# Altium PCB 400003.PcbDoc
Units mm, origin at the board's own origin, x right, y up, seen from the top; angles counter-clockwise.
Board outline 28.23 x 22.35 mm, 4 copper layers (Top Layer, Mid-Layer 1, Mid-Layer 2, Bottom Layer), stack 0.852 mm thick; 75 components, 55 nets, 330 pads, 176 vias.
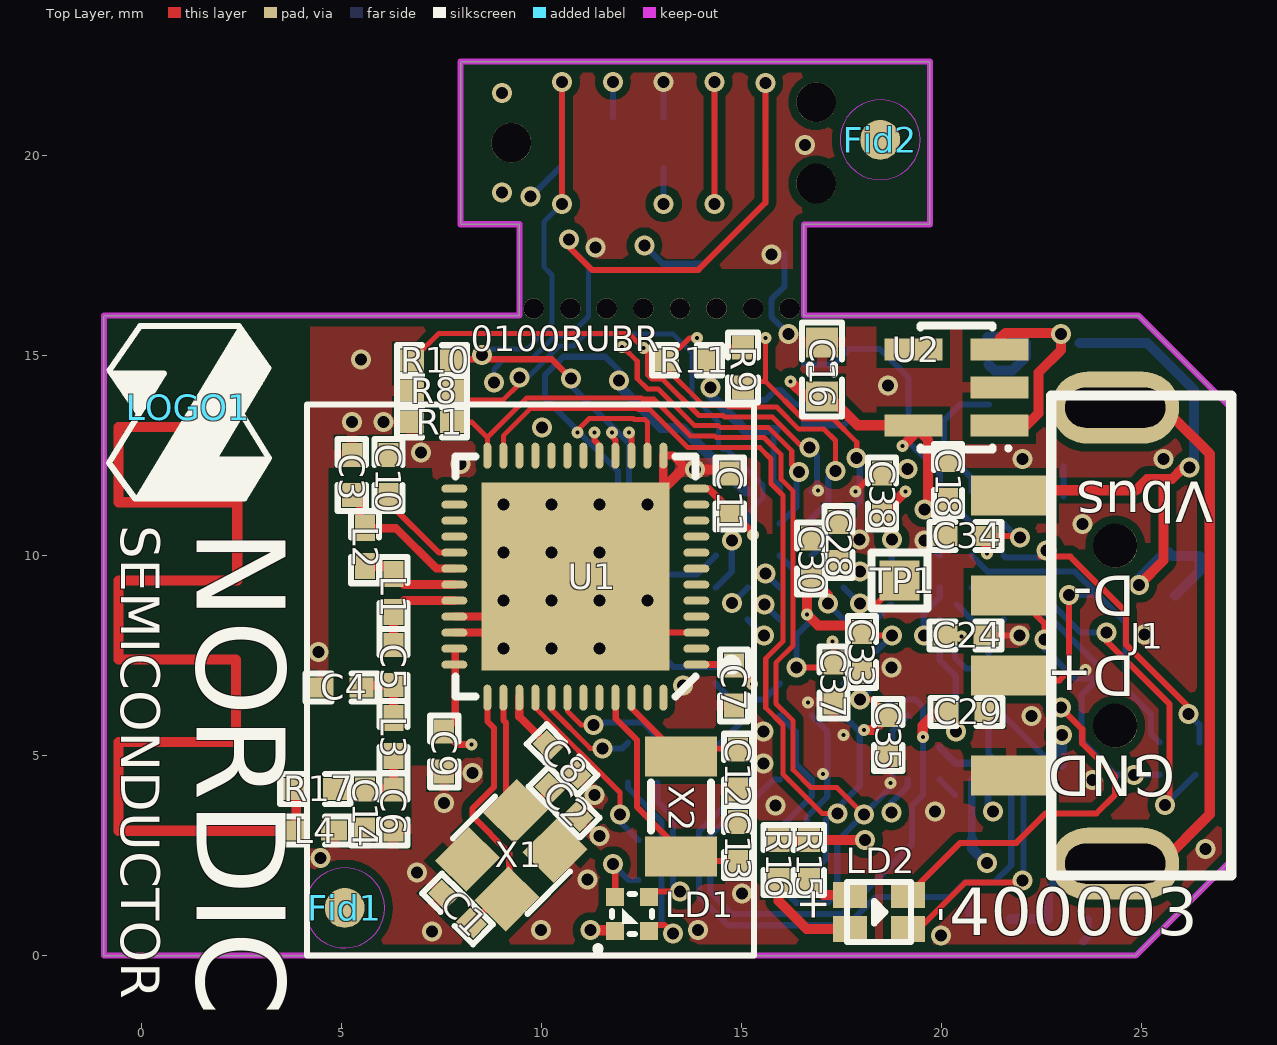
[diagram p0: Top Layer view]
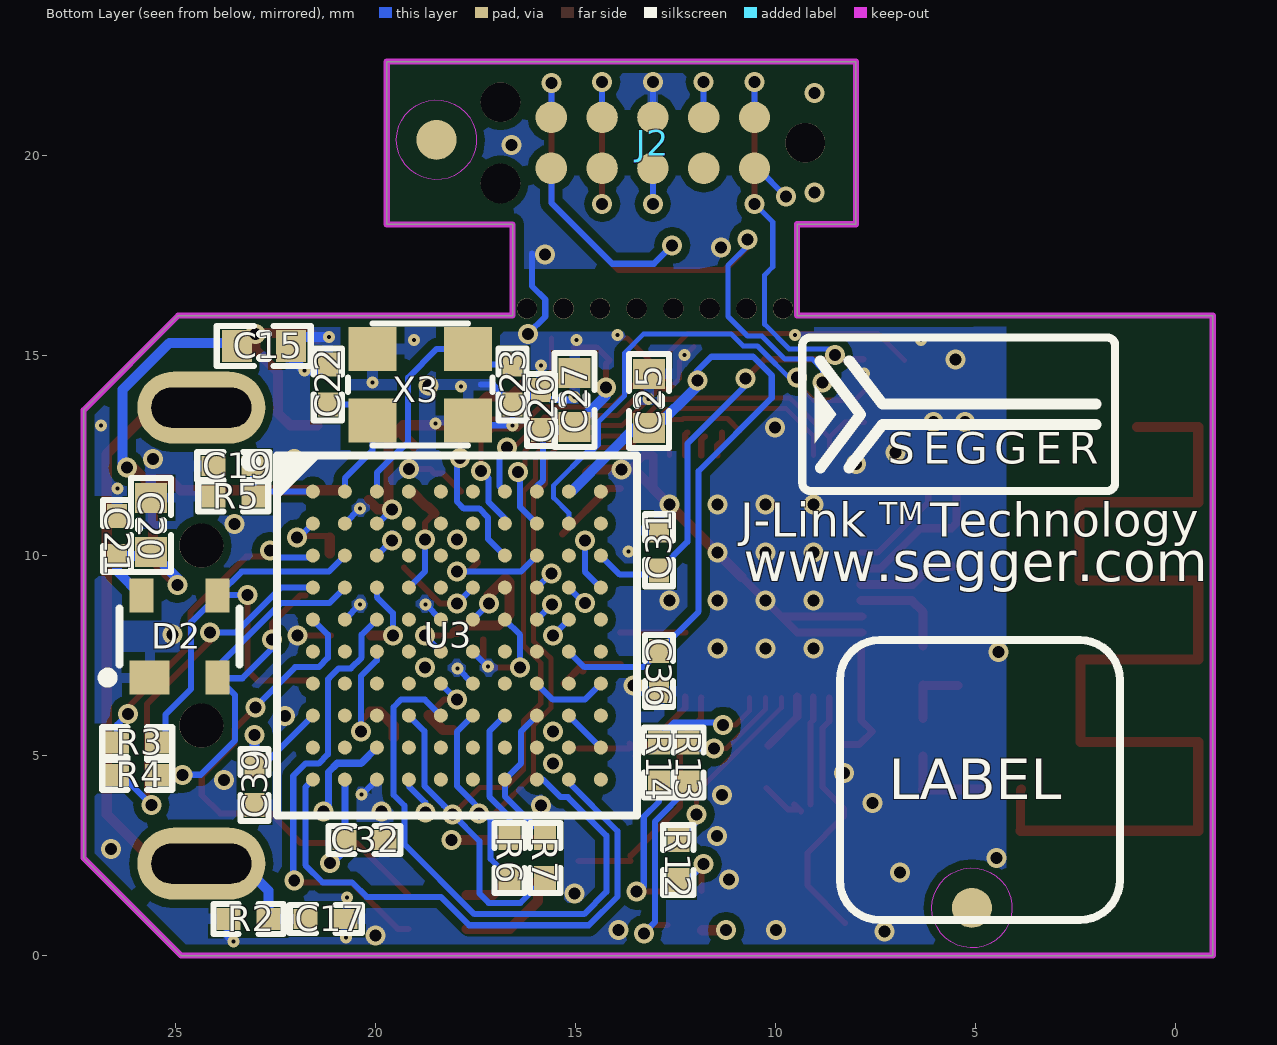
[diagram p1: Bottom Layer view, seen from below]
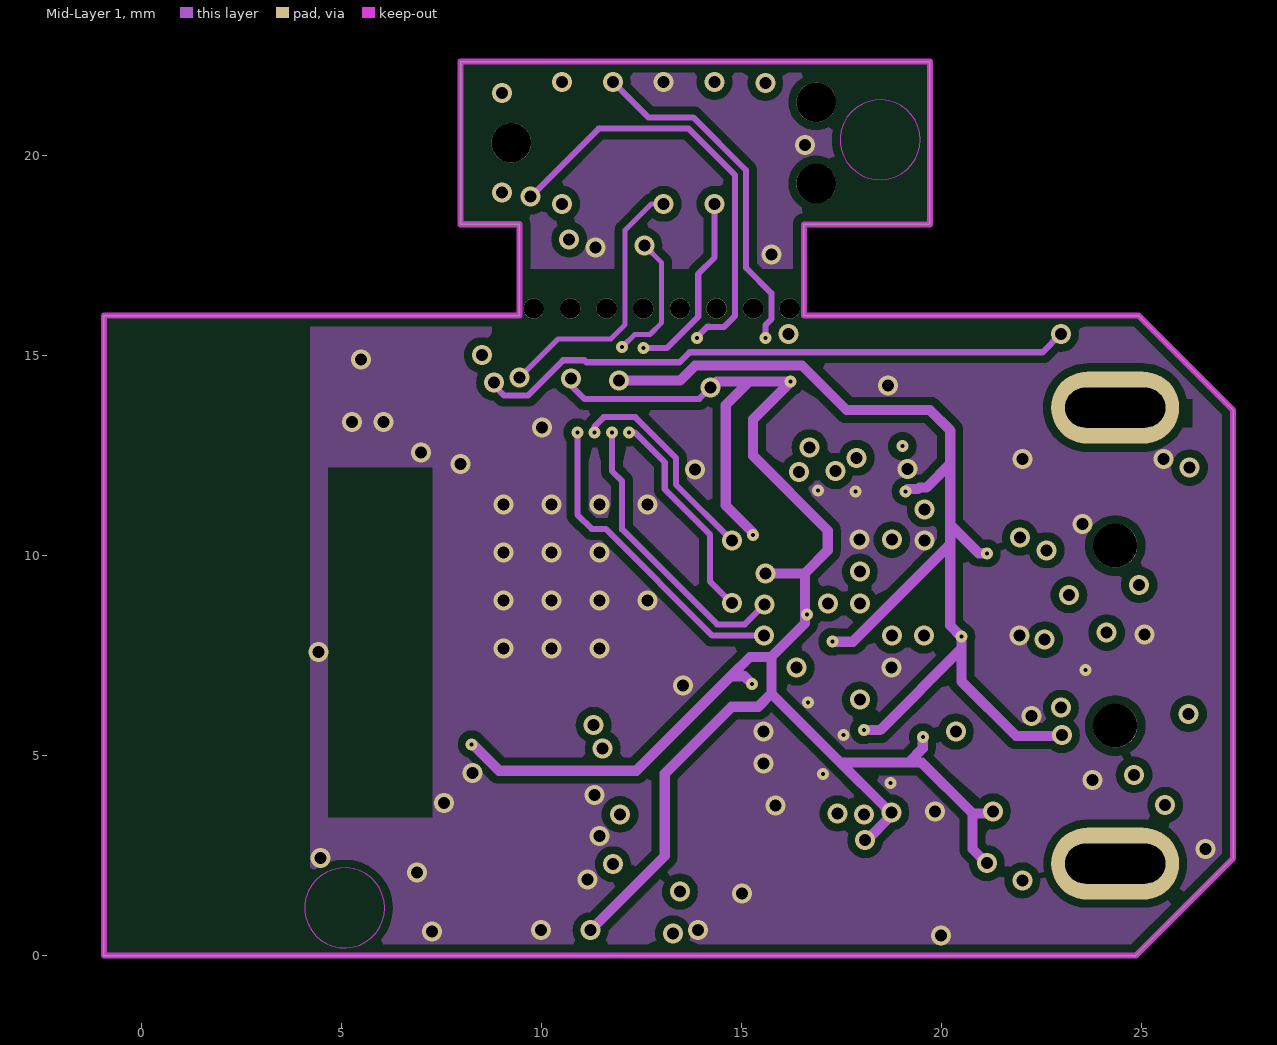
[diagram p2: Mid-Layer 1]
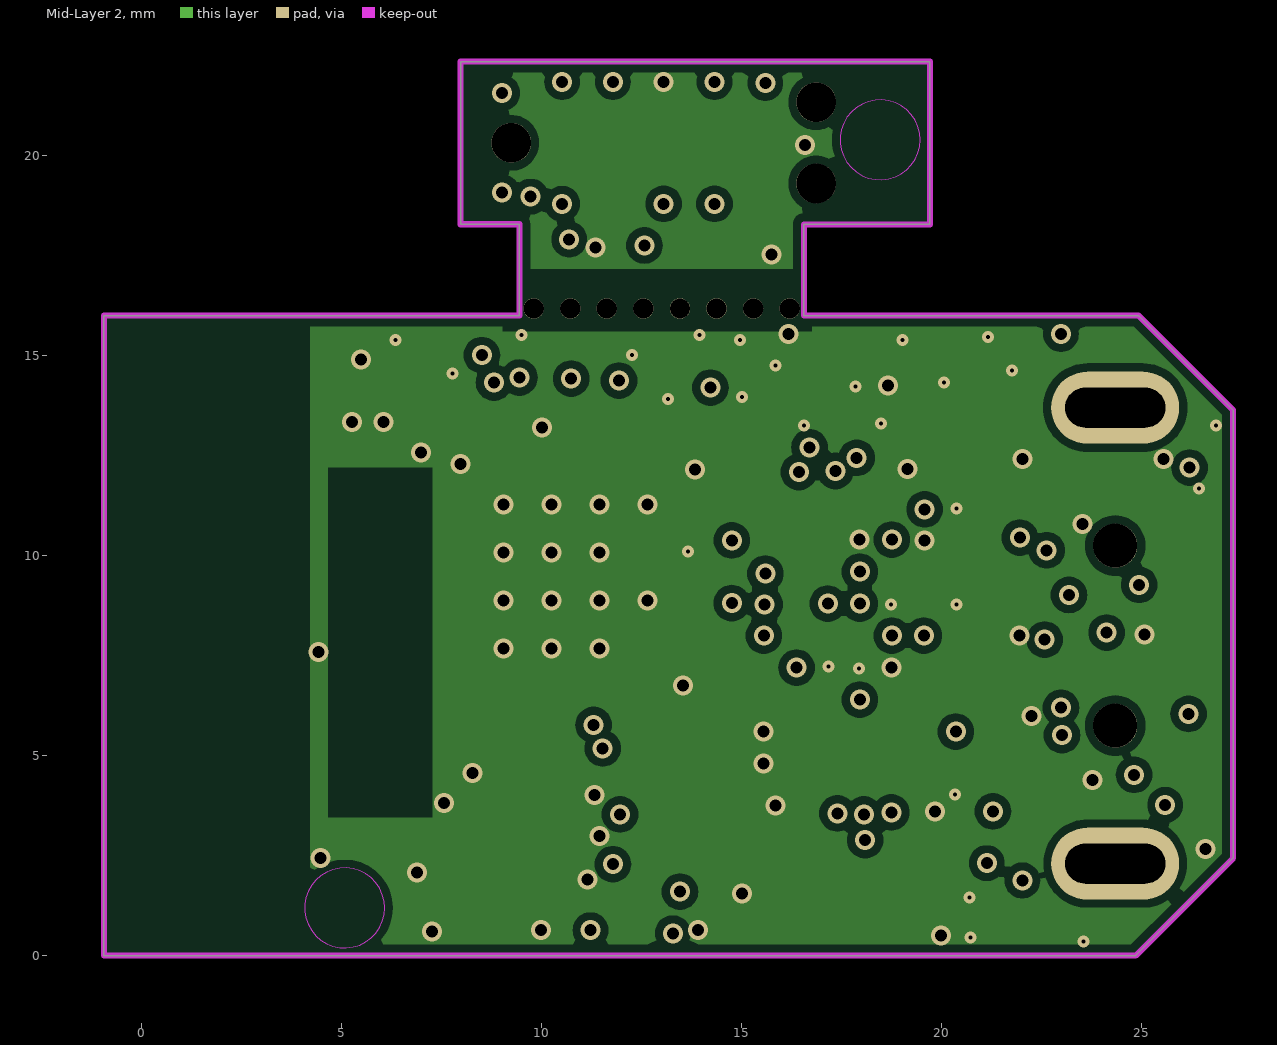
[diagram p3: Mid-Layer 2]

## Layer stack, top to bottom
Top Layer: signal copper 0.0356
Dielectric: prepreg 0.23, FR-4, Dk 4.4
Mid-Layer 1: signal copper 0.0356
Dielectric: core 0.25, FR-4, Dk 4.8
Mid-Layer 2: signal copper 0.0356
Dielectric: prepreg 0.23, FR-4, Dk 4.8
Bottom Layer: signal copper 0.0356

## Board outline
-0.94,0 -0.94,16.002 9.449,16.002 9.449,18.285 7.981,18.285 7.981,22.352 19.71,22.352 19.71,18.283 16.561,18.283 16.561,16 24.928,16 27.289,13.639 27.289,2.437 24.852,0

## Design rules (kind name [scope] priority, off if disabled: settings)
Clearance ANT_Clerance [InNet('ANT')] p1: gap=0.127
Clearance Polygon_Clearance [(InNamedPolygon('Top_Layer-GND')) or (InNamedPolygon('Bottom_Layer-GND')) or (InNamedPolygon('Mid_Layer_1-GND')) or (InNamedPolygon('Mid_Layer_2-GND'))] p2: gap=0.203
Clearance SB_Clearance [HasFootprint('Solderbridge')] p3: gap=0.127
Clearance [All] p4: gap=0.127
ComponentClearance [All] p1 off: gap=0.254 collisioncheckmode=3 verticalgap=0.254 showdistances=FALSE
FabricationTestPointUsage TestPointUsage [All] p1: valid=0 allowmultiple=FALSE
FabricationTestpoint Testpoint [All] p1: side=3 testpointundercomponent=TRUE minsize=1.016 maxsize=2.54 preferedsize=1.524 minholesize=0 maxholesize=1.016 preferedholesize=0.813 testpointgrid=0.025 allowsidetop=TRUE allowsidebottom=TRUE usegrid=TRUE gridtolerance=0
Height [All] p1 off: minheight=0 maxheight=25.4 prefheight=12.7
HoleSize [All] p1: absolutevalues=TRUE maxlimit=2.54 minlimit=0.1 maxpercent=80.000 minpercent=20.000
MinimumAnnularRing [All] p1 off: minimumring=0.152
PolygonConnect PolygonConnect_1 [isVia and innet(gnd)] p1: connectstyle=Direct reliefconductorwidth=0.254 reliefentries=4 polygonreliefangle="90 Angle" airgapwidth=0.254
PolygonConnect [All] p2: connectstyle=Relief reliefconductorwidth=0.254 reliefentries=4 polygonreliefangle="90 Angle" airgapwidth=0.254
RoutingVias [All] p1: holewidth=0.203 width=0.406 viastyle="Through Hole" minholewidth=0.1 minwidth=0.254 maxholewidth=0.711 maxwidth=1.27
SilkscreenOverComponentPads [All] p1: minsilkscreentomaskgap=0.254
SolderMaskExpansion [All] p1: expansion=0.076
Width [All] p1: maxlimit=2.54 minlimit=0.127 preferedwidth=0.152 minimp=50.000000 maximp=50.000000 favimp=50.000000
22 further rules are at their usual default settings.

## Classes and differential pairs
component class l-link-ob-sam3u-bga: C17 C18 C19 C20 C21 C22 C23 C24 C25 C26 C27 C28 C29 C30 C31 C32 C33 C34 C35 C36 C37 C38 C39 D2 J1 J2 LD2 R2 R3 R4 R5 R6 R7 R8 R9 R10 R11 R15 R16 TP1 U3 X3
component class nrf51822: C1 C2 C3 C4 C5 C6 C7 C8 C9 C10 C11 C12 C13 C14 L1 L2 L3 L4 R1 R17 U1 X1 X2
component class nrf51822_dev_dongle_interfaces: C15 C16 Fid1 Fid2 LD1 LOGO1 R12 R13 R14 U2

## Components (designator, comment, footprint, x,y, rotation, side; value= is the part's Value field where it differs from the comment)
C1 "12pF" CAPC1005X04L 7.899,1.168 r135 top (schematic designator C7)
C2 "12pF" CAPC1005X04L 10.566,3.835 r315 top
C3 "2.2nF" CAPC1005X04L 5.258,12.014 r90 top
C4 "0.8pF" CAPC1005X04L 5.004,6.706 r180 top
C5 "2.2pF" CAPC1005X04L 6.299,7.264 r270 top
C6 "1.5pF" CAPC1005X04L 6.299,3.658 r270 top
C7 "100nF" CAPC1005X04L 14.808,6.756 r270 top (schematic designator C9)
C8 "100nF" CAPC1005X04L 10.516,4.902 r315 top (schematic designator C10)
C9 "1.0nF" CAPC1005X04L 7.569,5.105 r270 top locked (schematic designator C8)
C10 "47nF" CAPC1005X04L 6.172,12.014 r90 top (schematic designator C11)
C11 "100nF" CAPC1005X04L 14.707,11.559 r90 top (schematic designator C12)
C12 "12pF" CAPC1005X04L 14.91,4.648 r270 top (schematic designator C14)
C13 "12pF" CAPC1005X04L 14.91,2.845 r90 top
C14 "1.0pF" CAPC1005X04L 5.588,3.658 r270 top (schematic designator C15)
C15 "1.0µF" CAPC1608X06L 22.784,15.24 r0 bottom
C16 "1.0µF" CAPC1608X06L 17.018,14.656 r270 top
C17 "100nF" CAPC1005X04L 21.234,0.914 r0 bottom
C18 "100nF" CAPC1005X04L 20.168,11.887 r270 top
C19 "10pF" CAPC1005X04L 23.546,12.243 r180 bottom
C20 "10µF" CAPC1608X06L 25.603,10.77 r270 bottom
C21 "100nF" CAPC1005X04L 26.454,10.49 r270 bottom
C22 "18pF" CAPC1005X04L 21.184,14.275 r90 bottom
C23 "18pF" CAPC1005X04L 16.561,14.275 r270 bottom
C24 "100nF" CAPC1005X04L 20.599,8.001 r0 top locked
C25 "10µF" CAPC1608X06L 13.157,13.868 r270 bottom
C26 "100nF" CAPC1005X04L 15.85,13.64 r270 bottom
C27 "10µF" CAPC1608X06L 15.011,13.894 r270 bottom
C28 "10nF" CAPC1005X04L 17.424,10.338 r270 top
C29 "100nF" CAPC1005X04L 20.625,6.096 r180 top
C30 "100nF" CAPC1005X04L 16.739,9.931 r270 top
C31 "100nF" CAPC1005X04L 12.903,10.135 r270 bottom
C32 "100nF" CAPC1005X04L 20.269,2.896 r0 bottom
C33 "100nF" CAPC1005X04L 18.009,7.595 r90 top
C34 "100nF" CAPC1005X04L 20.599,10.49 r0 top locked
C35 "100nF" CAPC1005X04L 18.669,5.512 r90 top
C36 "100nF" CAPC1005X04L 12.903,7.112 r90 bottom locked
C37 "100nF" CAPC1005X04L 17.297,6.833 r90 top
C38 "100nF" CAPC1005X04L 18.517,11.557 r270 top
C39 "100nF" CAPC1005X04L 23.012,4.267 r90 bottom
D2 "PRTR5V0U2X" SOT190P230X110-4L 24.887,7.976 r90 bottom locked
Fid1 "Fiducial mark" Fiducial 5.08,1.194 r0 top
Fid2 "Fiducial mark" Fiducial 18.466,20.396 r0 top
J1 "USB-A" USB-PCB-A-SMD 24.344,8 r90 top locked (schematic designator OB_J1)
J2 "TC2050-IDC" TC2050-IDC-NLFP 13.056,20.32 r0 bottom locked
L1 "4.7nH" INDC1005X04L 6.299,9.068 r270 top
L2 "10nH" INDC1005X04L 5.588,10.211 r270 top
L3 "3.3nH" INDC1005X04L 6.299,5.461 r270 top
L4 "1.8nH" INDC1005X04L 4.343,3.124 r180 top (schematic designator L5)
LD1 "LED RGB" SML-LX0404SIUPGUSB 12.268,1.041 r180 top
LD2 "LTST-C195KGJRKT" LED_DUAL_0606 18.44,1.092 r90 top
LOGO1 "Nordic Logo M" NORDIC_LOGO_M 1.17,13.708 r270 top
R1 "12k" RESC1005X04L 7.264,13.335 r180 top
R2 "10k" RESC1005X04L 23.165,0.914 r180 bottom
R3 "39R" RESC1005X04L 25.948,5.334 r180 bottom
R4 "39R" RESC1005X04L 25.948,4.521 r180 bottom
R5 "6k8" RESC1005X04L 23.546,11.481 r180 bottom
R6 "150R" RESC1005X04L 16.637,2.438 r270 bottom
R7 "150R" RESC1005X04L 15.748,2.438 r270 bottom
R8 "4k7" RESC1005X04L 7.264,14.122 r180 top
R9 "4k7" RESC1005X04L 15.037,14.707 r90 top
R10 "4k7" RESC1005X04L 7.264,14.884 r0 top
R11 "4k7" RESC1005X04L 13.64,14.884 r0 top
R12 "2k2" RESC1005X04L 12.421,2.388 r270 bottom
R13 "680R" RESC1005X04L 12.167,4.826 r270 bottom
R14 "820R" RESC1005X04L 12.903,4.826 r270 bottom
R15 "220R" RESC1005X04L 16.688,2.388 r270 top
R16 "220R" RESC1005X04L 15.926,2.388 r270 top
R17 "0R" RESC1005X04L 4.343,4.166 r180 top (schematic designator C11)
TP1 "1.0mm,SMD" TP_SMD_1.0mmX1.0mm 18.948,9.373 r0 top
U1 "nRF51822-QFAA" QFN40P600X600X90-48N 10.846,9.474 r180 top locked
U2 "TLV70233DBVT" SOT-23-5 20.372,14.209 r90 top
U3 "ATSAM3U2CA-CU" BGA100C80P10X10_900X900X110 17.958,8.001 r180 bottom locked
X1 "16MHz" BT-XTAL_2520 9.246,2.515 r45 top
X2 "32.768kHz" FC-135 13.487,3.734 r270 top
X3 "12MHz" BT-XTAL_3225 18.872,14.275 r180 bottom

## Footprints (in the part's own frame and the unit in brackets; to place one, negate y for a bottom-side part, rotate by r counter-clockwise, add the part's x,y. Pads: shape width x height; smd on the part's side, far side on the other; paste and mask are expansions set on the pad)
BGA100C80P10X10_900X900X110 [mm] "BGA, 100-Leads, Body 9,0x9,0mm,  Pitch 0,80mm"
  round 0.35 smd: A1(-3.6,3.6) A2(-2.8,3.6) A3(-2,3.6) A4(-1.2,3.6) A5(-0.4,3.6) A6(0.4,3.6) A7(1.2,3.6) A8(2,3.6) A9(2.8,3.6) A10(3.6,3.6) B1(-3.6,2.8) B2(-2.8,2.8) B3(-2,2.8) B4(-1.2,2.8) B5(-0.4,2.8) B6(0.4,2.8) B7(1.2,2.8) B8(2,2.8) B9(2.8,2.8) B10(3.6,2.8) C1(-3.6,2) C2(-2.8,2) C3(-2,2) C4(-1.2,2) C5(-0.4,2) C6(0.4,2) C7(1.2,2) C8(2,2) C9(2.8,2) C10(3.6,2) D1(-3.6,1.2) D2(-2.8,1.2) D3(-2,1.2) D4(-1.2,1.2) D5(-0.4,1.2) D6(0.4,1.2) D7(1.2,1.2) D8(2,1.2) D9(2.8,1.2) D10(3.6,1.2) E1(-3.6,0.4) E2(-2.8,0.4) E3(-2,0.4) E4(-1.2,0.4) E5(-0.4,0.4) E6(0.4,0.4) E7(1.2,0.4) E8(2,0.4) E9(2.8,0.4) E10(3.6,0.4) F1(-3.6,-0.4) F2(-2.8,-0.4) F3(-2,-0.4) F4(-1.2,-0.4) F5(-0.4,-0.4) F6(0.4,-0.4) F7(1.2,-0.4) F8(2,-0.4) F9(2.8,-0.4) F10(3.6,-0.4) G1(-3.6,-1.2) G2(-2.8,-1.2) G3(-2,-1.2) G4(-1.2,-1.2) G5(-0.4,-1.2) G6(0.4,-1.2) G7(1.2,-1.2) G8(2,-1.2) G9(2.8,-1.2) G10(3.6,-1.2) H1(-3.6,-2) H2(-2.8,-2) H3(-2,-2) H4(-1.2,-2) H5(-0.4,-2) H6(0.4,-2) H7(1.2,-2) H8(2,-2) H9(2.8,-2) H10(3.6,-2) J1(-3.6,-2.8) J2(-2.8,-2.8) J3(-2,-2.8) J4(-1.2,-2.8) J5(-0.4,-2.8) J6(0.4,-2.8) J7(1.2,-2.8) J8(2,-2.8) J9(2.8,-2.8) J10(3.6,-2.8) K1(-3.6,-3.6) K2(-2.8,-3.6) K3(-2,-3.6) K4(-1.2,-3.6) K5(-0.4,-3.6) K6(0.4,-3.6) K7(1.2,-3.6) K8(2,-3.6) K9(2.8,-3.6) K10(3.6,-3.6)
  silkscreen extent -5.28,-4.5 4.5,4.5, body extent -4.5,-4.5 4.5,4.5, height 1.1
BT-XTAL_2520 [mm] "TSX-2520"
  rect 1.2x1.1 smd: 1(-0.85,-0.7) 2(0.85,-0.7) 3(0.85,0.7) 4(-0.85,0.7)
  silkscreen extent -1.55,-1.33 1.53,1.32, body extent -1.25,-1 1.27,1, height 0.56
BT-XTAL_3225 [mm] "Mercury X32 series"
  rect 1.2x1.1 smd: 1(-1.194,-0.89) 2(1.194,-0.89) 3(1.194,0.891) 4(-1.194,0.891)
  silkscreen extent -1.8,-1.52 1.8,1.52, body extent -1.6,-1.25 1.61,1.25, height 0.81
CAPC1005X04L [mm] "Chip Capacitor, 2-Leads, Body 1.0x0.5mm, IPC High Density"
  rect 0.6x0.5 smd: 1(-0.5,0) 2(0.5,0)
  silkscreen extent -0.9,-0.35 0.9,0.35, body extent -0.51,-0.25 0.51,0.25, height 0.5
CAPC1608X06L [mm] "Chip Capacitor, 2-Leads, Body 1.6x0.8mm, IPC High Density"
  rect 0.75x0.8 smd: 1(-0.675,0) 2(0.675,0)
  silkscreen extent -1.17,-0.5 1.17,0.5, body extent -0.8,-0.43 0.8,0.43, height 0.8
FC-135 [mm] "EPSON TOYOCOM - FC-135 32.768KHZ ±20PPM,9.0PF - CRYSTAL, SM, WATCH"
  rect 1x1.8 smd: 1(-1.25,0) 2(1.25,0)
  silkscreen extent -0.6,-0.75 0.6,0.75, body extent -1.6,-0.75 1.6,0.75, height 0.81
Fiducial [mm] "Fiducial Mark"
  round 1 smd paste-10 mask+0.5: 0(0,0)
  round 1 smd far side paste-10 mask+0.5: 0(0,0)
  Keep-Out Layer circle w0.01: c0,0 r1
INDC1005X04L [mm] "Chip Inductor, 2-Leads, Body 1.0x0.5mm, IPC High Density"
  rect 0.65x0.5 smd: 1(-0.475,0) 2(0.475,0)
  silkscreen extent -0.9,-0.35 0.9,0.35, body extent -0.5,-0.3 0.5,0.3, height 0.5
LED_DUAL_0606 [mm]
  rect 0.65x0.85 smd paste+0: 1(0.425,0.725) 2(-0.425,0.725) 3(0.425,-0.725) 4(-0.425,-0.725)
  silkscreen extent -0.75,-0.8 0.75,0.8, body extent -0.75,-0.8 0.75,0.8, height 0.55
NORDIC_LOGO_M [mm] "Medium Nordic Logo"
  silkscreen extent -2.03,-1.98 2.28,2.02
QFN40P600X600X90-48N [mm] "QFN, 48-Leads, Body 6,0x6,0mm (max), Pitch 0,40mm, IPC Medium Density"
  oval 0.65x0.2 smd: 1(-3.025,2.2) 2(-3.025,1.8) 3(-3.025,1.4) 4(-3.025,1) 5(-3.025,0.6) 6(-3.025,0.2) 7(-3.025,-0.2) 8(-3.025,-0.6) 9(-3.025,-1) 10(-3.025,-1.4) 11(-3.025,-1.8) 12(-3.025,-2.2) 25(3.025,-2.2) 26(3.025,-1.8) 27(3.025,-1.4) 28(3.025,-1) 29(3.025,-0.6) 30(3.025,-0.2) 31(3.025,0.2) 32(3.025,0.6) 33(3.025,1) 34(3.025,1.4) 35(3.025,1.8) 36(3.025,2.2)
  oval 0.2x0.65 smd: 13(-2.2,-3.025) 14(-1.8,-3.025) 15(-1.4,-3.025) 16(-1,-3.025) 17(-0.6,-3.025) 18(-0.2,-3.025) 19(0.2,-3.025) 20(0.6,-3.025) 21(1,-3.025) 22(1.4,-3.025) 23(1.8,-3.025) 24(2.2,-3.025) 37(2.2,3.025) 38(1.8,3.025) 39(1.4,3.025) 40(1,3.025) 41(0.6,3.025) 42(0.2,3.025) 43(-0.2,3.025) 44(-0.6,3.025) 45(-1,3.025) 46(-1.4,3.025) 47(-1.8,3.025) 48(-2.2,3.025)
  rect 4.7x4.7 smd: 49(0,0)
  silkscreen extent -4.03,-3 3,3, body extent -3,-3 3,3, height 0.9
RESC1005X04L [mm] "Chip Resistor, 2-Leads, Body 1.0x0.5mm, IPC High Density"
  rect 0.6x0.55 smd: 1(-0.5,0) 2(0.5,0)
  silkscreen extent -0.87,-0.38 0.88,0.38, body extent -0.5,-0.25 0.5,0.25, height 0.3
SML-LX0404SIUPGUSB [mm]
  rect 0.45x0.45 smd paste+0: 1(0.425,-0.425) 2(-0.425,0.425) 3(-0.425,-0.425) 4(0.425,0.425)
  silkscreen extent -0.5,-0.5 0.92,0.93, body extent -0.5,-0.5 0.5,0.5, height 0.25
SOT190P230X110-4L [mm] "SOT143, 4-Leads, Body 3.0x2.5mm (max), Pitch 1.90mm, IPC High Density"
  rect 0.85x1 smd: 1(-1.025,0.75)
  rect 0.85x0.6 smd: 2(-1.025,-0.95) 3(1.025,-0.95) 4(1.025,0.95)
  silkscreen extent -1.15,-1.5 0.7,1.93, body extent -1.21,-1.46 1.21,1.46, height 1
SOT-23-5 [mm] "SOT-23/SC-74A; 5 Leads; Body 3.1 x 3 mm, inc. leads (LxW max)"
  rect 0.55x1.45 smd: 1(-0.95,-1.075) 2(0,-1.075) 3(0.95,-1.075) 4(0.95,1.075) 5(-0.95,1.075)
  silkscreen extent -1.57,-1.35 1.55,0.9, body extent -1.5,-1.5 1.5,1.5, height 1.3
TC2050-IDC-NLFP [mil]
  round 39 hole 39 unplated: 0(-150,0) 0(150,-40) 0(150,40)
  round 31 smd paste-196.85: 1(-100,-25) 2(-50,-25) 3(0,-25) 4(50,-25) 5(100,-25) 6(100,25) 7(50,25) 8(0,25) 9(-50,25) 10(-100,25)
  Top Layer pour cut-out: -100,25 -100,-25 100,-25 100,25
TP_SMD_1.0mmX1.0mm [mm]
  rect 1x1 smd: 1(0,0)
  silkscreen extent -0.7,-0.7 0.7,0.7
USB-PCB-A-SMD [mm] "USB connector for PBC"
  oval 1.8x3.2 hole 1 slot 2.5 at 90 deg: 0(-5.7,0) 0(5.7,0)
  round 1.1 hole 1.1: 0(-2.25,0) 0(2.25,0)
  rect 1x2 smd paste-5: 1(3.5,2.6) 2(1,2.6) 3(-1,2.6) 4(-3.5,2.6)
  silkscreen extent -6,-2.9 6,1.6, body extent -6.25,-17.7 6.25,3, height 3.17

## Part data
C1 C2 C12 C13: library part C0402-12p, "Capacitor, NP0, ±2%"
C3: library part C0402-2n2, "Capacitor, X7R, ±10%"
C4: library part C0402-0.8p, "Capacitor, NP0, ±5%"
C5: library part C0402-2.2p, "Capacitor, NP0, ±0.1pF"
C6: library part C0402-1.5p, "Capacitor, NP0, ±0.1pF"
C7 C8 C11 C17 C18 C21 C24 C26 C29 C30 C31 C32 C33 C34 C35 C36 C37 C38 C39: library part C0402-100n, "Capacitor, X7R, ±10%"
C9: library part C0402-1n0, "Capacitor, X7R, ±10%"
C10: library part C0402-47n, "Capacitor, X7R, ±10%"
C14: library part C0402-1.0p, "Capacitor, NP0, ±0.1pF"
C15 C16: library part C0603-1µ0, "Capacitor, X5R, ±10%"
C19: library part C0402-10p, "Capacitor, NP0, ±2%"
C20 C25 C27: library part C0603-10µ, "Capacitor, X5R, ±10%"
C22 C23: library part C0402-18p, "Capacitor, NP0, ±5%"
C28: library part C0402-10n, "Capacitor, X7R, ±10%"
D2: "Ultra low capacitance double rail-to-rail ESD protection diode"
Fid1 Fid2: library part Fid-Mark, "Fiducial Mark"
J1: library part "Molex USB-A-SMT_w/shield", "Molex USB-A-SMT"
J2: library part TC2050-IDC-NLFP, "CBL PLUG-OF-NAILS 10-PIN"
L1: library part L0402-4n7, "Inductor, 160mA, ±0.1nH"
L2: library part L0402-10n, "Inductor, 100mA, ±2%"
L3: library part L0402-3n3, "Inductor, 190mA, ±0.1nH"
L4: library part L0402-1n8, "Inductor, 280mA, ±0.1nH"
LD1: library part SML-LX0404SIUPGUSB, "RGB LED 1.00 mm x 1.00 mm SMD"
LD2: "Avago, HSMF-A203 Bi-Color LED"
LOGO1: "Nordic Logo, medium size"
R1: library part R0402-12k, "Resistor, ±1%, 0.063W"
R2: library part R0402-10k, "Resistor, ±1%, 0.063W"
R3 R4: library part R0402-39R, "Resistor, ±1%, 0.063W"
R5: library part R0402-6k8, "Resistor, ±1%, 0.063W"
R6 R7: library part R0402-150, "Resistor, ±1%, 0.063W"
R8 R9 R10 R11: library part R0402-4k7, "Resistor, ±1%, 0.063W"
R12: library part R0402-2k2, "Resistor, ±1%, 0.063W"
R13: library part R0402-680, "Resistor, ±1%, 0.063W"
R14: library part R0402-820, "Resistor, ±1%, 0.063W"
R15 R16: library part R0402-220, "Resistor, ±1%, 0.063W"
R17: library part R0402-0R, "Resistor, ±5%, 0.063W"
TP1: library part TP_SMD_1.0MM, "Regular Plated, 1.0mm hole"
U1: library part nRF51822-Q48-6x6_DCDC, "Multi-protocol Bluetooth Low Energy and 2.4GHz proprietary system-on-chip"
U2: "IC REG LDO 3.3V 300MA SOT23-5"
U3: "IC MCU 32bit 128kB flash 100TFBGA"
X1: library part NX2520SA-16MHZ-STD-CSW-5, "XTAL SMD 2520, 16MHz, 8pF, ±15ppm"
X2: library part "XTAL_FC-135 32.768k", "EPSON TOYOCOM - FC-135 32.768KHZ ±20PPM,9.0PF - CRYSTAL, SM, WATCH"
X3: library part "XTAL SMD 12MHz (3225)", "XTAL SMD 3225, 12MHz, 18pF, ±30ppm"

## Free pads (board coordinates)
  round 0.508 hole 0.508 unplated: 0(9.804,16.178) 0(10.719,16.178) 0(11.633,16.178) 0(12.548,16.178) 0(13.462,16.178) 0(14.376,16.178) 0(15.291,16.178) 0(16.205,16.178)

## Via types
v1: diameter 0.5, hole 0.3, Top Layer to Bottom Layer, tented both sides, 121 vias
v2: diameter 0.3, hole 0.1, Mid-Layer 2 to Bottom Layer, tented both sides, 28 vias
v3: diameter 0.3, hole 0.1, Top Layer to Mid-Layer 1, tented both sides, 27 vias

## Nets (pads, with @x,y where several pads share a name; then routed paths per layer and width w, separated by ;. In a path a pad name is that pad's centre, name@x,y a point inside that pad or via, vN(x,y) a via of type N, cw(c..) or ccw(c..) an arc to the next point about the centre after c; other vN are vias at no path point)
ANT: L4.2 R17.2 | length 28.9
  Top Layer w0.229: R17.2 3.868,4.141 L4.2
  Top Layer w0.254: 0.949,13.216 -0.577,13.216 -0.577,11.336 2.392,11.336 2.392,9.381 -0.577,9.381 -0.577,7.399 2.367,7.399 2.367,5.342 -0.577,5.342 -0.577,3.124 L4.2
ANT1: L1.1 L2.2 U1.31 | length 2.4
  Top Layer w0.229: L2.2 6.106,9.736 6.568,9.274 U1.31@7.846,9.274
ANT2: C5.1 L1.2 U1.32 | length 2.5
  Top Layer w0.229: C5.1@6.299,7.739 L1.2 6.581,8.874 U1.32@7.846,8.874
CTS: U1.14 U3.E9 | length 11.3
  Top Layer w0.127: v3@10.884,13.118 11.193,13.428 12.295,13.428 12.321,13.402 12.583,13.402 12.646,13.338 U1.14
  Mid-Layer 1 w0.152: v3(10.897,13.081) 10.897,11.024 11.252,10.668 11.608,10.668 14.275,8.001 v1(15.558,8.001)
  Bottom Layer w0.152: U3.E9 v1(15.558,8.001)
DEC1: C8.1 U1.39 | length 1.5
  Top Layer w0.203: U1.39@9.446,6.474 9.446,5.972 C8.1
DEC2: C10.1 U1.29 | length 2.4
  Top Layer w0.152: C10.1 6.172,11.34 7.438,10.074 U1.29@7.846,10.074
DFSDM: R4.1 U3.D1 | length 9.1
  Top Layer w0.152: v1(24.13,8.077) 24.13,7.86 25.705,6.285 25.705,3.878 v1(25.594,3.767)
  Bottom Layer w0.152: U3.D1 22.362,9.201 23.486,8.077 v1(24.13,8.077) ; v1(25.594,3.767) R4.1@26.348,4.521
DFSDP: R3.1 U3.C1 | length 7.7
  Top Layer w0.152: v1@22.479,9.977 23.223,9.977 24.617,8.583 24.617,7.768 26.178,6.207 v1(26.178,6.045)
  Bottom Layer w0.152: U3.C1 21.602,9.957 22.458,9.957 v1@22.479,9.977 ; v1(26.178,6.045) 26.448,5.775 R3.1
  other v1: 22.631,10.135
DHSDM: D2.2 J1.2 R4.2 U3.D2 | length 11.7
  Top Layer w0.152: J1.2 21.882,9 22.581,8.302 v1(22.581,7.899)
  Bottom Layer w0.152: U3.D2 21.145,8.814 22.354,8.814 23.937,7.231 D2.2 D2.2@23.921,6.934 ; v1(22.581,7.899) 22.581,7.671 23.317,6.934 D2.2@23.921,6.934 ; R4.2 24.359,4.521 23.5,5.38 23.5,6.513 D2.2@23.921,6.934
  other v1: 24.816,4.521
DHSDP: D2.3 J1.3 R3.2 U3.C2 | length 12.2
  Top Layer w0.152: J1.3@21.6,6.883 22.949,6.883 23.187,7.121 v1(23.187,9.017)
  Bottom Layer w0.152: U3.C2 21.158,9.601 23.337,9.601 D2.3@23.921,9.017 ; v1(23.187,9.017) D2.3@23.921,9.017 ; R3.2 25.242,5.54 25.242,6.025 24.6,6.667 24.6,8.338 D2.3 D2.3@23.921,9.017
ENSPI: U3.K1 U3.K9 | length 14.4
  Bottom Layer w0.152: U3.K9 15.158,4.332 13.94,3.114 13.94,1.478 14.659,0.759 17.65,0.759 18.36,1.469 20.214,1.469 20.574,1.829 21.311,1.829 21.744,2.262 21.744,4.215 U3.K1
GND: C1.2 C2.2 C3.2 C4.2 C6.2 C7.2 C8.2 C9.2 C10.2 C11.2 C12.2 C13.2 C14.2 C15.1 C16.1 C17.1 C18.1 C19.1 C20.1 C21.1 C22.2 C23.2 C24.2 C25.1 C26.1 C27.1 C28.1 C29.1 C30.1 C31.1 C32.1 C33.1 C34.1 C35.1 C36.1 C37.1 C38.1 C39.1 D2.1 J1.4 J2.3 L4.1 R1.2 R2.1 R5.1 R8.2 U1.3 U1.13 U1.33 U1.34 U1.49 U2.2 U3.B2 U3.C3 U3.E2 U3.E5 U3.F6 U3.G6 U3.K3 X1.2 X1.4 X3.2 X3.4 | length 31.1
  Top Layer w0.152: U1.49@12.246,8.074 U1.3 ; v3(17.856,11.608) 18.305,12.057 C38.1 18.626,12.167 v1(19.152,12.167) ; C24.2 v1(21.946,8.001)
  Top Layer w0.203: U1.34 9.446,8.074 U1.49@9.846,8.474 ; U1.33 U1.49@9.846,8.474 ; U1.49 U1.49@9.846,8.474 ; U1.49@13.046,11.674 U1.13 13.286,12.499 13.634,12.151 v1(13.837,12.151)
  Top Layer w0.254: U1.49 v1(12.646,11.274) U1.49@13.046,11.674 ; U1.49@12.929,11.557 13.478,12.106 ; v1(13.837,12.151) 14.614,12.151 C11.2
  Bottom Layer w0.152: J2.3 v1(13.056,21.844) ; v2@15.088,13.894 15.604,13.894 C26.1 15.99,14.14 16.355,13.775 C23.2 ; 16.078,17.551 16.078,16.739 15.748,16.408 15.748,15.977 v1(16.18,15.545) ; v2(17.18,7.223) U3.F6 ; 17.348,14.275 17.043,14.275 16.561,13.792 C23.2 ; U3.G6 v2(17.936,7.179) ; X3.2 17.553,13.259 v2(16.561,13.259) C23.2 ; U3.E5 v2(18.736,8.779) ; v1(19.58,10.379) U3.C3 ; U3.K3 v2(20.336,4.023) ; v2(20.38,8.779) U3.E2 ; v2(20.38,11.179) U3.B2
  Bottom Layer w0.203: C17.1@20.701,0.948 v2(20.701,1.448) ; v2(23.546,0.356) 23.665,0.475 R2.1
  Bottom Layer w0.254: v2(21.158,15.469) 21.956,15.469 22.109,15.316 22.109,14.971 v2(21.768,14.63) 21.328,14.63 C22.2
  other v1: 19.99,0.508 7.264,0.61 9.982,0.635 13.919,0.635 15.011,1.549 11.151,1.905 6.883,2.083 4.47,2.438 26.603,2.667 11.455,2.997 19.837,3.607 15.85,3.759 7.569,3.81 11.328,4.013 23.774,4.394 8.28,4.572 15.555,4.799 15.555,5.599 22.25,5.994 13.538,6.756 18.755,7.199 4.42,7.595 9.046,7.674 10.246,7.674 11.446,7.674 25.07,8.026 9.046,8.874 10.246,8.874 11.446,8.874 12.646,8.874 9.046,10.074 10.246,10.074 11.446,10.074 17.955,10.399 23.52,10.795 9.046,11.274 10.246,11.274 11.446,11.274 7.976,12.294 22.022,12.421 25.552,12.421 6.985,12.573 10.008,13.208 5.258,13.335 6.045,13.335 18.669,14.249 5.486,14.91 15.748,17.526 11.354,17.704 16.586,20.269
  other v2: 20.726,0.457 13.665,10.109 26.441,11.684 26.857,13.259 18.491,13.31 13.166,13.919 15.011,13.97 17.856,14.224 20.066,14.326 7.772,14.554 15.85,14.755 12.268,15.011 6.35,15.392 14.961,15.392 19.025,15.392 9.5,15.519 13.945,15.519
  other v3: 18.72,4.318 17.043,4.547 17.551,5.512 16.662,6.325 23.597,7.137 16.916,11.633
NetC4_1: C4.1 C5.2 L3.1 | length 1.7
  Top Layer w0.229: C4.1@5.428,6.756 C5.2@6.291,6.756 ; L3.1 C5.2
NetC6_1: C6.1 C14.1 L3.2 R17.1 | length 2.3
  Top Layer w0.229: C6.1 L3.2
  Top Layer w0.254: R17.1@4.851,4.158 C6.1
NetC17_2: C17.2 J1.0@24.344,2.3 J1.0@24.344,13.7 R2.2 | length 18.4
  Top Layer w0.254: J1.0@24.344,2.3 25.474,2.3 26.708,3.533 26.708,12.545 25.552,13.7 J1.0@24.344,13.7
  Bottom Layer w0.254: C17.2 R2.2 22.665,1.621 23.344,2.3 J1.0@24.411,2.3
NetC19_2: C19.2 R5.2 U3.A1 | length 2.1
  Bottom Layer w0.152: U3.A1 R5.2@22.926,11.601 ; R5.2 C19.2
NetC28_2: C28.2 U3.C8 | length 2.8
  Top Layer w0.152: C28.2 17.661,9.601 v1(17.958,9.601)
  Bottom Layer w0.152: U3.C8 16.358,9.601 v1(17.958,9.601)
NetLD1_1: LD1.1 R12.2 | length 1.4
  Top Layer w0.152: v1(11.786,2.286) 11.843,2.228 LD1.1@11.843,1.619
  Bottom Layer w0.152: v1@11.836,2.235 12.184,1.888 R12.2
NetLD1_2: LD1.2 R13.2 | length 4.9
  Top Layer w0.152: LD1.2@12.693,0.769 13.074,0.769 v1(13.284,0.559)
  Bottom Layer w0.152: R13.2 12.167,4.191 13.005,3.353 13.005,0.838 v1(13.284,0.559)
NetLD1_3: LD1.3 R14.2 | length 3.7
  Top Layer w0.152: LD1.3@12.693,1.619 12.712,1.6 v1(13.462,1.6)
  Bottom Layer w0.152: R14.2 12.903,3.85 13.284,3.469 13.284,1.727 v1@13.411,1.6
NetLD2_1: LD2.1 R15.2 | length 1.2
  Top Layer w0.254: R15.2 17.058,1.517 LD2.1
NetLD2_2: LD2.2 R16.2 | length 2.6
  Top Layer w0.254: R16.2 15.926,1.372 16.63,0.667 LD2.2
NetTP1_1: TP1.1 U3.D6 | length 2.3
  Top Layer w0.152: v1(17.958,8.801) 18.377,8.801 TP1.1 TP1.1@19.279,9.703
  Bottom Layer w0.152: U3.D6 v1(17.958,8.801)
OB_LED1: LD2.4 U3.E3 | length 11.1
  Top Layer w0.152: LD2.4 19.438,0.667 20.599,1.829 21.971,1.829 v1(22.022,1.88)
  Bottom Layer w0.152: U3.E3 20.336,8.023 20.336,7.452 20.608,7.179 20.914,7.179 21.136,6.958 21.136,6.952 21.18,6.909 21.18,5.033 21.412,4.801 21.742,4.801 22.047,4.496 v1@22.047,1.854
OB_LED2: LD2.3 U3.E1 | length 12.4
  Top Layer w0.152: LD2.3 20.468,2.819 21.869,2.819 22.606,3.556 23.876,3.556 24.333,4.013 24.333,4.496 23.52,5.309 23.52,5.664 v1(22.987,6.198)
  Bottom Layer w0.152: U3.E1 21.18,8.023 21.18,7.444 21.41,7.214 21.996,7.214 v1@23,6.21
P0.09: U1.15 U3.D9 | length 6.7
  Top Layer w0.152: v3(12.192,13.081) 12.246,13.027 U1.15 ; v1@14.757,8.763 v1@14.757,8.801
  Mid-Layer 1 w0.152: v3(12.192,13.081) 12.33,13.081 13.081,12.33 13.081,11.663 14.212,10.532 14.212,9.359 v1(14.757,8.814)
  Bottom Layer w0.152: v1@14.757,8.763 14.757,8.801 U3.D9
P0.10: U1.16 U3.E8 | length 8.3
  Top Layer w0.152: v3@11.76,12.979 11.846,12.894 U1.16
  Mid-Layer 1 w0.152: v3(11.76,13.081) 11.76,12.116 12.014,11.862 12.014,10.657 14.391,8.28 15.081,8.28 v1(15.58,8.779)
  Bottom Layer w0.152: v1(15.58,8.779) U3.E8
P0.11: U1.17 U3.D10 | length 7.3
  Top Layer w0.152: v3(11.328,13.081) 11.328,12.878 11.446,12.76 U1.17
  Mid-Layer 1 w0.152: v3(11.328,13.081) 11.328,13.233 11.557,13.462 12.344,13.462 13.36,12.446 13.36,11.779 v1(14.758,10.381)
  Bottom Layer w0.152: U3.D10 14.758,9.601 v1(14.758,10.381) v1@14.758,10.401
P0.21: R12.1 U1.40 | length 4.6
  Top Layer w0.127: U1.40 9.846,6.195 11.963,4.077 v1(11.963,3.531)
  Bottom Layer w0.152: v1(11.963,3.531) 11.963,3.345 R12.1
P0.22: R13.1 U1.41 | length 2.7
  Top Layer w0.127: U1.41@10.236,6.449 10.236,6.164 11.218,5.182 v1(11.532,5.182)
  Bottom Layer w0.152: v1(11.532,5.182) 12.022,5.182 R13.1
P0.23: R14.1 U1.42 | length 2.9
  Top Layer w0.127: U1.42 10.646,6.113 10.993,5.766 v1(11.303,5.766)
  Bottom Layer w0.152: v1@11.405,5.817 11.417,5.829 12.526,5.829 12.903,5.452 R14.1
RESET: J2.10 R11.1 U3.B7 | length 20.6
  Top Layer w0.127: v3(13.894,15.443) 13.699,15.443 R11.1 13.14,14.66 14.042,13.758 14.641,13.758 14.683,13.716 15.879,13.716 16.434,13.161 17.065,13.161 17.348,12.878 v1(17.348,12.116)
  Mid-Layer 1 w0.152: v1(9.728,18.974) 11.43,20.676 13.676,20.676 14.834,19.518 14.834,15.988 14.566,15.721 14.187,15.721 14.185,15.723 14.148,15.723 13.894,15.469 v3(13.894,15.443)
  Bottom Layer w0.152: v1(9.728,18.974) 10.439,19.685 J2.10 ; U3.B7 16.758,10.931 17.17,11.344 17.17,11.938 v1(17.348,12.116)
RTCKIN: U3.J4
SWCLK: R1.1 R7.2 U1.24 U3.H4 | length 27.6
  Top Layer w0.127: R1.1 8.266,13.335 8.646,12.955 ; U1.24 8.646,12.955 ; v1(18.059,3.531) 17.384,4.206 16.733,4.206 16.291,4.648 16.291,5.871 15.86,6.302 15.86,7.321 16.291,7.752 16.291,11.61 15.993,11.908 15.993,12.524 15.563,12.954 14.367,12.954 14.325,12.996 13.726,12.996 12.812,13.91 12.532,13.91 12.505,13.936 9.626,13.936 9.6,13.91 8.646,12.955
  Bottom Layer w0.152: R7.2 16.366,1.321 17.161,1.321 17.395,1.555 17.395,2.866 v1(18.059,3.531) 18.288,3.759 18.288,3.765 18.771,4.248 18.771,5.614 U3.H4
SWDIO: R6.2 U1.23 U3.H6 | length 22.9
  Top Layer w0.127: U1.23 9.046,12.996 9.732,13.682 12.4,13.682 12.427,13.656 12.707,13.656 13.663,12.7 15.458,12.7 15.739,12.418 15.739,11.803 16.037,11.505 16.037,7.857 15.74,7.561 ; 15.739,7.561 15.606,7.427 15.606,6.197 16.037,5.766 16.037,4.537 17.018,3.556 v1(17.399,3.556)
  Bottom Layer w0.152: R6.2 17.115,2.417 17.115,3.399 17.958,4.242 17.958,5.601 U3.H6
TCKOUT: R7.1 U3.H8 U3.K7 | length 3.8
  Bottom Layer w0.152: R7.1 15.748,2.972 16.758,3.982 U3.K7 16.358,4.801 16.358,5.601 U3.H8
TCKS: J2.4 R10.1 U3.A7 | length 21.4
  Top Layer w0.127: R10.1 7.435,15.555 12.182,15.555 v3(12.548,15.189) 12.649,15.087 12.649,14.53 12.761,14.419 13.022,14.419 13.936,13.504 14.536,13.504 14.578,13.462 15.773,13.462 16.586,12.649 16.739,12.649 16.701,12.687 v1(16.701,12.71)
  Top Layer w0.152: v1(14.326,18.796) v1(14.326,21.844)
  Mid-Layer 1 w0.152: v3(12.548,15.189) 13.132,15.189 13.919,15.977 13.919,17.043 14.326,17.45 v1(14.326,18.796)
  Bottom Layer w0.152: J2.4 v1(14.326,21.844) ; U3.A7 16.891,11.734 16.891,12.497
TDIIN: U3.H5 U3.K8 | length 14.7
  Bottom Layer w0.152: U3.K8 15.798,4.401 15.36,3.962 15.183,3.962 14.22,2.999 14.22,1.593 14.775,1.038 17.519,1.038 19.266,2.785 19.266,3.747 19.541,4.021 19.541,6.215 19.355,6.401 18.758,6.401 U3.H5
TDIS: J2.8 R8.1 U3.B9 | length 19.9
  Top Layer w0.127: R8.1 8.002,13.885 9.034,13.885 v1@9.449,14.3
  Mid-Layer 1 w0.127: v1(9.449,14.453) 10.414,15.418 11.735,15.418 12.09,15.773 12.09,18.136 12.751,18.796 v1(13.056,18.796)
  Mid-Layer 1 w0.152: v1@9.423,14.3 v1@9.436,14.313
  Bottom Layer w0.127: v1@9.449,14.3 9.498,14.3 10.438,15.24 10.799,15.24 11.103,15.545 13.284,15.545 13.767,15.062 13.767,13.996 14.421,13.342 14.421,12.765 14.532,12.653 14.64,12.653 15.536,11.758 15.536,11.444 15.158,11.066 U3.B9
  Bottom Layer w0.152: v1(13.056,18.796) J2.8
TDOIN: U3.J8
TDOS: J2.6 U3.B8 | length 15.7
  Top Layer w0.127: v3@12.027,15.227 12.395,14.859 12.395,14.425 12.656,14.165 12.916,14.165 13.831,13.25 14.43,13.25 14.472,13.208 15.668,13.208 16.256,12.62 16.256,12.268 v1(16.434,12.09)
  Mid-Layer 1 w0.127: v3(12.014,15.215) 12.329,15.53 12.71,15.53 13.005,15.824 13.005,17.323 v1(12.573,17.755)
  Bottom Layer w0.152: v1(12.573,17.755) 13.03,17.297 14.072,17.297 15.596,18.821 J2.6 ; U3.B8 16.379,11.223 v1@16.379,12.09
TMSOUT: R6.1 U3.H7 | length 3.4
  Bottom Layer w0.152: R6.1 16.637,3.466 17.145,3.974 17.145,5.614 U3.H7
TMSS: J2.2 R9.1 U3.C7 | length 17.9
  Top Layer w0.127: R9.1 15.189,14.359 15.596,14.359 ; v3(15.596,15.443) 15.596,14.359 ; v1(17.882,12.446) 17.882,12.835 17.301,13.415 16.539,13.415 15.596,14.359
  Mid-Layer 1 w0.152: v1(11.786,21.844) 12.675,20.955 13.792,20.955 15.113,19.634 15.113,17.196 15.748,16.561 15.748,15.912 15.596,15.76 v3(15.596,15.443)
  Bottom Layer w0.152: J2.2 v1(11.786,21.844) ; U3.C7 17.18,10.423 17.18,10.958 17.401,11.179 17.714,11.179 17.718,11.176 17.78,11.176 17.958,11.354 17.958,12.37 v1(17.882,12.446)
TRESIN: U3.G8 U3.G10 | length 1.9
  Bottom Layer w0.152: U3.G10 14.758,6.401 15.558,6.401 U3.G8
TRSTIN: U3.H9 U3.J10 | length 1.1
  Bottom Layer w0.152: U3.J10 U3.H9
V5: C15.2 C20.2 C21.2 D2.4 J1.1 J2.5 U2.1 U2.3 | length 52.2
  Top Layer w0.152: v1(10.693,17.907) 10.693,17.713 11.262,17.145 13.919,17.145 15.596,18.821 v1(15.596,21.819)
  Top Layer w0.254: J1.1@20.877,11.633 24.867,11.633 25.146,11.913 25.552,11.913 ; U2.1 22.123,13.259 22.426,13.561 22.426,14.577 22.987,15.138 v1(22.987,15.545) ; U2.3@21.447,15.413 21.604,15.57 v1@22.987,15.57 ; v1(24.943,9.271) 25.552,9.881 25.552,11.913 ; v1(26.204,12.201) 26.046,12.201 25.761,11.917 25.556,11.917 25.552,11.913
  Mid-Layer 1 w0.152: v1@8.853,14.214 9.068,13.999 9.656,13.999 10.541,14.884 11.074,14.884 11.123,14.836 13.455,14.836 13.704,15.085 22.527,15.085 v1(22.987,15.545)
  Bottom Layer w0.127: v1(8.814,14.326) 8.814,14.656 9.07,14.912 9.751,14.912 10.333,15.494 10.693,15.494 11.176,15.977 11.176,17.259 10.693,17.741 v1(10.693,17.907)
  Bottom Layer w0.152: v1@8.738,14.275 v1@8.801,14.338 ; J2.5 v1(15.596,21.819)
  Bottom Layer w0.254: C15.2@23.459,15.316 25.145,15.316 26.314,14.146 26.314,12.312 v1(26.204,12.201) ; v1(24.943,9.271) 24.943,9.434 C20.2 25.664,10.095 25.768,9.99 C21.2 26.454,9.618 D2.4
VCC3: C7.1 C9.1 C11.1 C16.2 C18.2 C26.2 C27.2 C29.2 C30.2 C31.2 C32.2 C33.2 J2.1 LD1.4 R9.2 R10.2 R11.2 R15.1 R16.1 U1.1 U1.12 U1.35 U1.36 U2.5 U3.A8 U3.B3 U3.C10 U3.D8 U3.E6 U3.F3 U3.F5 U3.J3 U3.K2 U3.K4 | length 107.8
  Top Layer w0.152: R10.2@7.79,14.91 10.262,14.91 v1(10.744,14.427) ; v1(10.516,18.796) v1(10.516,21.844) ; v1(14.224,14.199) 14.224,14.8 R11.2 14.462,15.207 R9.2 ; C33.2 18.102,8.001 v1(18.758,8.001) ; C29.2 20.358,5.863 v1(20.358,5.601)
  Top Layer w0.178: U1.35@7.846,7.674 7.846,5.882 C9.1 7.891,5.283 v3(8.255,5.283) ; U1.1 14.808,7.274 v3@15.278,6.804 ; U1.12 14.183,11.674 v3@15.316,10.541 ; C7.1@14.808,7.112 C7.1@14.808,7.148
  Top Layer w0.254: v1(11.227,0.635) LD1.4@11.825,0.635 ; R16.1 v1(18.093,2.888) ; v3(16.231,14.351) 16.601,13.981 C16.2 17.185,13.981 17.907,13.259 U2.5 ; v1(17.158,8.801) 17.158,9.012 C30.2 16.637,9.33 v3(16.637,8.534) 16.916,8.255 17.791,8.255 17.951,8.095 C33.2 ; v3(19.025,12.735) 19.297,13.007 U2.5 ; v3(19.533,5.461) 19.533,5.751 19.877,6.096 C29.2 ; C18.2 19.939,11.159 v1(19.581,11.159) 19.664,11.241 19.664,12.892 U2.5
  Mid-Layer 1 w0.152: v1(10.744,14.427) 10.744,14.249 11.074,13.919 13.945,13.919 v1(14.224,14.199)
  Mid-Layer 1 w0.254: v3(8.255,5.283) 8.282,5.283 8.942,4.623 12.37,4.623 14.732,6.985 ; v1(11.227,0.635) 13.081,2.489 13.081,4.547 14.757,6.223 15.418,6.223 15.748,6.553 ; v1(14.224,14.199) 14.376,14.351 15.189,14.351 ; v3(15.265,6.792) 15.072,6.985 14.732,6.985 ; v3(15.291,10.516) 15.291,10.566 14.605,11.252 14.605,13.767 15.189,14.351 ; v1(15.596,9.551) 16.574,9.551 16.586,9.563 ; v1(18.093,2.888) 18.129,2.888 18.745,3.504 v1(18.745,3.581) 18.72,3.581 18.563,3.738 18.563,3.739 17.477,4.826 17.475,4.826 ; v3(19.533,5.461) 19.533,5.182 19.177,4.826 ; v1(21.133,2.311) 20.777,2.667 20.777,3.556 ; v1(21.285,3.607) 21.234,3.556 20.777,3.556 ; 14.732,6.985 15.215,7.468 15.748,7.468 ; 15.189,14.351 v3(16.231,14.351) 15.291,13.411 15.291,12.497 17.158,10.63 17.158,10.135 16.586,9.563 ; 15.748,6.553 17.475,4.826 ; 15.748,6.553 15.748,7.468 ; 15.748,7.468 16.586,8.306 16.586,9.563 ; 17.475,4.826 19.177,4.826 ; 19.177,4.826 19.507,4.826 20.777,3.556
  Bottom Layer w0.127: v1(8.509,15.011) 8.664,15.166 9.646,15.166 10.262,15.782 10.262,17.018 10.058,17.221 10.058,18.339 v1(10.516,18.796)
  Bottom Layer w0.152: J2.1 v1(10.516,21.844) ; v1(10.744,14.427) 10.744,14.249 12.192,12.802 12.192,10.346 C31.2 ; C31.2@12.903,9.525 13.882,9.525 U3.C10 ; v1@15.564,9.595 U3.D8 ; C26.2 15.799,13.089 15.799,11.89 15.958,11.731 U3.A8 ; v1(17.158,8.801) U3.E6 ; U3.F5 v1(18.758,8.001) ; v1(18.745,3.581) 18.745,3.827 19.158,4.24 U3.K4 ; v1(19.581,11.159) 19.938,10.801 U3.B3 ; U3.F3 19.958,7.385 20.358,6.985 v1(20.358,5.601)
  Bottom Layer w0.178: U3.J3 20.349,4.81 20.946,4.81 21.167,4.589 21.167,3.725 v1(21.285,3.607) ; C32.2@20.758,2.958 U3.K2
  Bottom Layer w0.254: v1(14.224,14.199) 14.224,14.006 C27.2 ; C27.2@15.065,13.14 C26.2 ; C32.2 20.769,2.675 v1(21.133,2.311)
VCORE: C24.1 C25.2 C34.2 C35.2 C36.2 C37.2 C38.2 C39.2 U3.A9 U3.B1 U3.D3 U3.D4 U3.E7 U3.F9 U3.G5 U3.H1 | length 60.2
  Top Layer w0.152: v1(16.377,7.201) 17.166,7.201 C37.2 v3@17.297,7.899 ; v1(17.958,6.401) 18.28,6.401 C35.2 ; C38.2 18.758,10.816 v1(18.758,10.401) ; C34.2 v1@21.869,10.49
  Top Layer w0.254: v3(18.059,5.639) 18.296,5.639 C35.2 ; C38.2 18.686,11.227 18.72,11.227 v3(19.101,11.608) ; v1(19.558,8.001) C24.1 ; v3(21.133,10.058) C34.2@21.133,10.457
  Mid-Layer 1 w0.254: v1@11.963,14.376 13.462,14.376 13.841,14.755 16.512,14.755 17.628,13.64 19.71,13.64 20.218,13.132 20.218,12.294 ; v3(17.272,7.849) 17.78,7.849 20.218,10.287 ; v3(18.059,5.639) 18.466,5.639 20.498,7.671 ; v3(19.101,11.608) 19.156,11.663 19.411,11.663 19.454,11.705 19.63,11.705 20.218,12.294 ; v3(21.133,10.058) 20.93,10.058 20.218,10.77 ; v1(23.012,5.512) 22.991,5.49 21.865,5.49 20.498,6.858 20.498,7.671 ; 20.218,10.287 20.218,10.77 ; 20.218,10.287 20.218,8.255 v3(20.498,7.976) 20.498,7.671 ; 20.218,10.77 20.218,12.294
  Bottom Layer w0.152: v1@11.963,14.224 11.963,14.605 11.595,14.973 10.549,14.973 10.084,14.509 10.084,13.945 11.913,12.116 11.913,8.603 C36.2 13.302,7.214 14.77,7.214 U3.F9 ; v1(16.377,7.201) 16.377,8.021 U3.E7 ; v1@18.008,6.452 U3.G5 ; v1(18.758,10.401) 18.758,9.601 U3.D4 ; v1(19.558,8.001) 19.558,8.564 19.958,8.963 U3.D3 ; U3.H1 C39.2@22.883,4.676 ; U3.B1 v1@21.958,10.401
  Bottom Layer w0.254: v1@11.963,14.224 12.994,13.193 C25.2 13.507,13.193 14.078,12.623 15.1,11.601 U3.A9 ; C39.2 v1(23.012,5.512)
  other v1: 21.958,10.452 11.938,14.376
VDD_PA: C3.1 L2.1 U1.30 | length 3.6
  Top Layer w0.203: C3.1@5.461,11.514 5.461,10.813 L2.1 6.359,10.686 7.371,9.674 U1.30@7.846,9.674
XC1: C1.1 U1.37 X1.1 | length 6.7
  Top Layer w0.152: C1.1 9.195,1.757 9.195,2.565 8.28,3.48 8.28,3.683 8.811,4.213 8.811,5.693 8.646,5.858 U1.37
XC2: C2.1 U1.38 X1.3 | length 4
  Top Layer w0.152: U1.38@9.046,6.474 U1.38 9.046,5.889 9.116,5.82 X1.3@9.116,3.781 ; X1.3 X1.3@9.452,3.711 ; X1.3@9.522,3.781 X1.3@9.452,3.711 ; C2.1 9.681,3.658 9.452,3.658 X1.3@9.452,3.711
XIN: C22.1 U3.A2 X3.1 | length 3.3
  Bottom Layer w0.152: U3.A2 20.758,11.932 20.066,12.624 X3.1 20.457,13.775 C22.1
XL1: C13.1 U1.45 X2.2 | length 6
  Top Layer w0.152: U1.45 11.858,6.437 11.858,5.922 12.384,5.396 12.384,3.724 X2.2@13.611,2.497 ; X2.2@13.611,2.37 C13.1@14.91,2.37
XL2: C12.1 U1.46 X2.1 | length 3.5
  Top Layer w0.152: U1.46@12.246,6.474 U1.46 12.246,6.195 13.457,4.984 X2.1 ; X2.1@13.474,5.135 X2.1@13.639,5.301 ; X2.1@13.639,5.174 C12.1@14.91,5.174
XOUT: C23.1 U3.A3 X3.3 | length 6.3
  Bottom Layer w0.152: C23.1 17.291,14.775 17.678,15.162 18.467,15.162 19.177,14.453 19.177,12.836 19.382,12.631 19.398,12.631 19.958,12.072 U3.A3
pads on no net: Fid1.0 Fid2.0 J1.0@24.344,5.75 J1.0@24.344,10.25 J2.0 J2.7 J2.9 U1.2 U1.4 U1.5 U1.6 U1.7 U1.8 U1.9 U1.10 U1.11 U1.18 U1.19 U1.20 U1.21 U1.22 U1.25 U1.26 U1.27 U1.28 U1.43 U1.44 U1.47 U1.48 U2.4 U3.A4 U3.A5 U3.A6 U3.A10 U3.B4 U3.B5 U3.B6 U3.B10 U3.C4 U3.C5 U3.C6 U3.C9 U3.D5 U3.D7 U3.E4 U3.E10 U3.F1 U3.F2 U3.F4 U3.F7 U3.F8 U3.F10 U3.G1 U3.G2 U3.G3 U3.G4 U3.G7 U3.G9 U3.H2 U3.H3 U3.H10 U3.J1 U3.J2 U3.J5 U3.J6 U3.J7 U3.J9 U3.K5 U3.K6 U3.K10
copper on no net:
  other v1: 9.017,19.075 9.017,21.565

## Polygon pours and split planes (outlines as drawn)
GND on Top Layer "Top_Layer-GND" (solid, remove dead copper, pour order 8): -2.297,-1.888 -2.297,29.711 -2.233,29.895 28.921,29.895 29,30.124 29,-1.796 29.032,-1.888
GND on Bottom Layer "Bottom_Layer-GND" (solid, remove dead copper, pour order 5): -1.839,-2.635 -1.839,30.775 -1.776,30.969 28.846,30.969 28.925,31.212 28.925,-2.537 28.956,-2.635
GND on Mid-Layer 1 "Mid_Layer_1-GND" (solid, remove dead copper, pour order 7): -2.297,-1.888 -2.297,29.711 -2.233,29.895 28.921,29.895 29,30.124 29,-1.796 29.032,-1.888
GND on Mid-Layer 2 "Mid_Layer_2-GND" (solid, remove dead copper, pour order 6): -2.551,-1.786 -2.551,29.813 -2.487,29.996 28.667,29.996 28.746,30.226 28.746,-1.695 28.778,-1.786

## Keep-outs
Keep-Out Layer:
  the board outline again, w0.152

## Other copper
Top Layer:
  pour cut-out: 9.017,17.17 16.764,17.17 16.764,15.596 9.017,15.596
  pour cut-out: -1.448,17.094 4.216,17.094 4.216,-0.737 -1.448,-0.737
  pour cut-out: 8.356,12.014 13.335,12.014 13.335,6.985 8.357,6.985
  pour cut-out: 9.891,4.866 10.567,5.542 11.124,4.985 10.448,4.309
  pour cut-out: 4.902,16.815 24.587,16.815 24.587,15.723 4.902,15.723
  pour cut-out: 3.962,5.08 6.248,5.08 6.248,3.48 3.962,3.48
  pour cut-out: 4.115,6.35 7.671,6.35 7.671,4.75 4.115,4.75
  pour cut-out: 4.674,12.192 7.264,12.192 7.264,5.664 4.674,5.664
Mid-Layer 1:
  pour cut-out: 9.449,14.529 8.752,14.529 8.752,16.358 9.449,16.358
  pour cut-out: 24.435,13.208 24.435,13.905 26.264,13.905 26.264,13.208
  pour cut-out: 15.697,15.24 15.697,15.937 17.526,15.937 17.526,15.24
  pour cut-out: 9.017,17.17 16.764,17.17 16.764,15.596 9.017,15.596
  pour cut-out: 4.674,12.192 7.264,12.192 7.264,3.454 4.674,3.454
  pour cut-out: -1.448,17.094 4.216,17.094 4.216,-0.737 -1.448,-0.737
Mid-Layer 2:
  pour cut-out: 9.017,17.17 16.764,17.17 16.764,15.596 9.017,15.596
  pour cut-out: 4.674,12.192 7.264,12.192 7.264,3.454 4.674,3.454
  pour cut-out: -1.448,17.094 4.216,17.094 4.216,-0.737 -1.448,-0.737
Bottom Layer:
  pour cut-out: 9.017,17.17 16.764,17.17 16.764,15.596 9.017,15.596
  pour cut-out: 5.029,16.802 24.714,16.802 24.714,15.71 5.029,15.71
  pour cut-out: -1.448,17.094 4.216,17.094 4.216,-0.737 -1.448,-0.737

## Silkscreen, mask and mechanical layers (free items; w line width, h text height)
Top Overlay:
  lines w0.152: 4.139,0 4.139,13.781 15.316,13.781 15.316,0 4.139,0
  text "0100RUBR" at 8.23,15.113 h0.64
  text "SEMICONDUCTOR" at -0.83,10.754 h1.65 r270
  text "NORDIC" at 0.66,10.668 h3.81 r270
  text "400003" at 20.193,0.127 h2.03
Bottom Overlay:
  region: 9.014,14.256 9.014,12.81 8.471,13.533
  lines w0.2: 1.382,1.889 ccw(c2.382,1.889) 2.382,0.889 7.382,0.889 ccw(c7.382,1.889) 8.382,1.889 8.382,6.889 ccw(c7.382,6.889) 7.382,7.889 2.382,7.889 ccw(c2.382,6.889) 1.382,6.889 1.382,1.889
  lines w0.203: 1.499,11.821 ccw(c1.702,11.821) 1.702,11.618 9.119,11.618 ccw(c9.119,11.821) 9.322,11.821 ; 1.499,11.823 1.499,15.232 ; 1.499,15.25 cw(c1.702,15.25) 1.702,15.453 9.119,15.453 cw(c9.119,15.25) 9.322,15.25 ; 9.322,11.823 9.322,15.232
  lines w0.279: 1.979,13.282 7.319,13.282 8.153,12.198 ; 1.979,13.79 7.319,13.79 8.145,14.863 ; 8.868,12.196 7.869,13.527 8.873,14.865
  text "R" at 2.662,12.04 h1.35
  text "E" at 3.498,12.04 h1.35
  text "G" at 4.521,12.04 h1.35
  text "G" at 5.512,12.04 h1.35
  text "E" at 6.296,12.04 h1.35
  text "S" at 7.186,12.04 h1.35
  text "TM" at 7.399,10.602 h0.94
  text "Technology" at 6.116,10.18 h1.45
  text "J-Link" at 10.869,10.18 h1.45
  text "www.segger.com" at 10.787,9.03 h1.68
  text "LABEL" at 7.163,3.912 h1.02
Mechanical 1:
  the board outline again, w0.152
Mechanical 4:
  lines w0.152: 12.116,16 12.116,0 23.852,0 26.289,2.437 26.289,13.639 23.928,16 12.133,16
Mechanical 15:
  lines w0.2: 0.882,1.389 ccw(c1.882,1.389) 1.882,0.389 7.882,0.389 ccw(c7.882,1.389) 8.882,1.389 8.882,7.389 ccw(c7.882,7.389) 7.882,8.389 1.882,8.389 ccw(c1.882,7.389) 0.882,7.389 0.882,1.389

## Text inside footprints (layer, text, board x,y; h text height)
J1: Top Overlay "D+" at 24.844,7.5 h1.02 r180; Top Overlay "D-" at 24.844,9.5 h1.02 r180; Top Overlay "Vbus" at 26.794,11.85 h1.02 r180; Top Overlay "GND" at 25.844,5 h1.02 r180
LD2: Top Overlay "-" at 20.285,0.838 h0.76 r90; Top Overlay "+" at 17.135,0.838 h0.76 r90